# Altium PCB AirReader.PcbDoc
Units mil, origin at the board's own origin, x right, y up, seen from the top; angles counter-clockwise.
Board outline 1377.95 x 3149.61 mil, 2 copper layers (Top Layer, Bottom Layer), stack 61.811 mil thick; 56 components, 46 nets, 271 pads, 33 vias.
Unrouted connection lines stored in the file: 52.
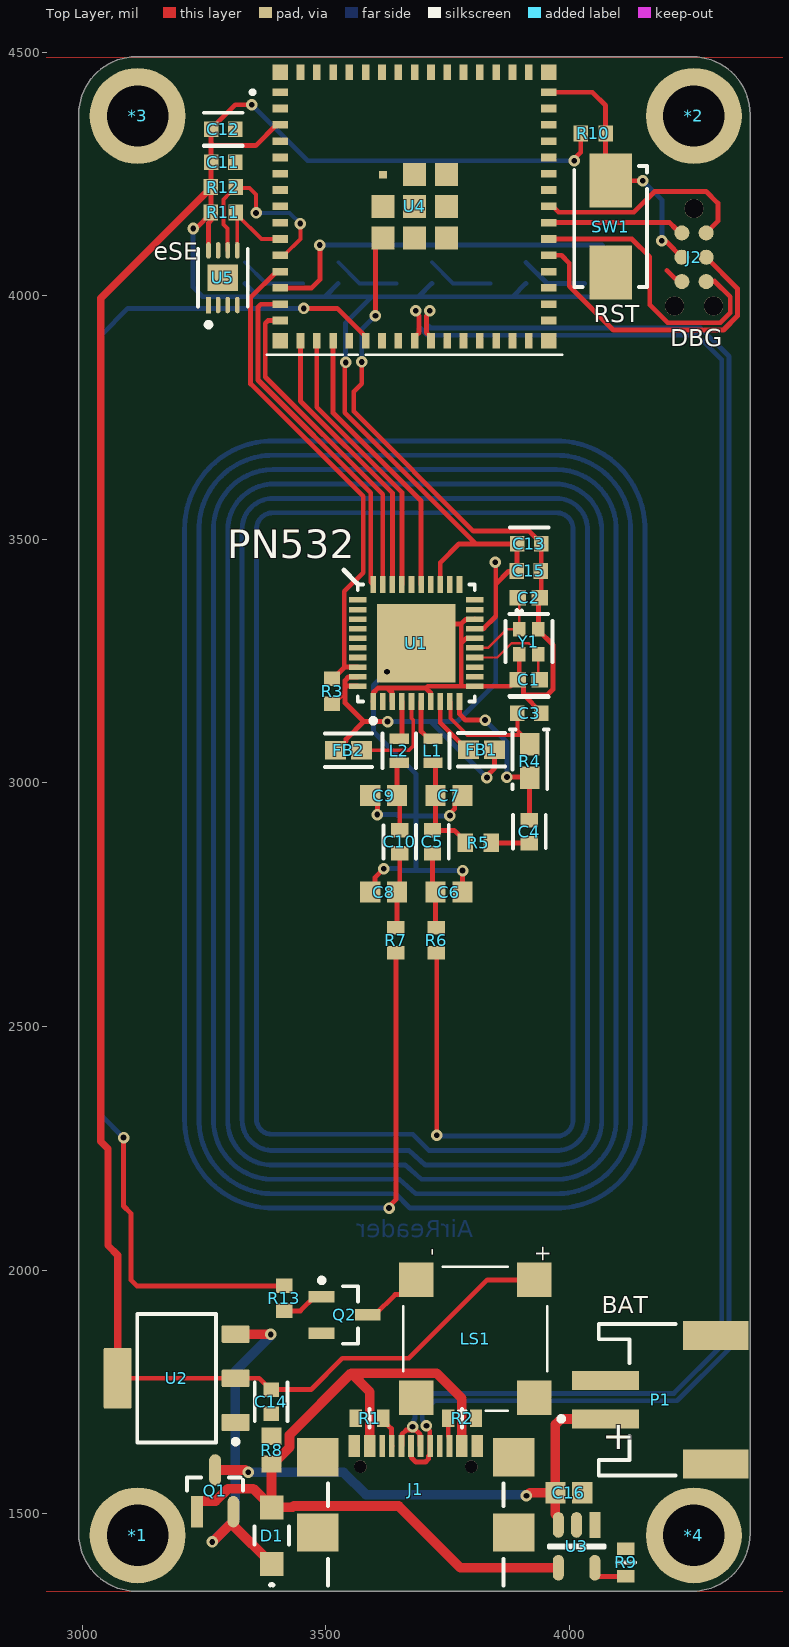
[diagram p0: Top Layer view]
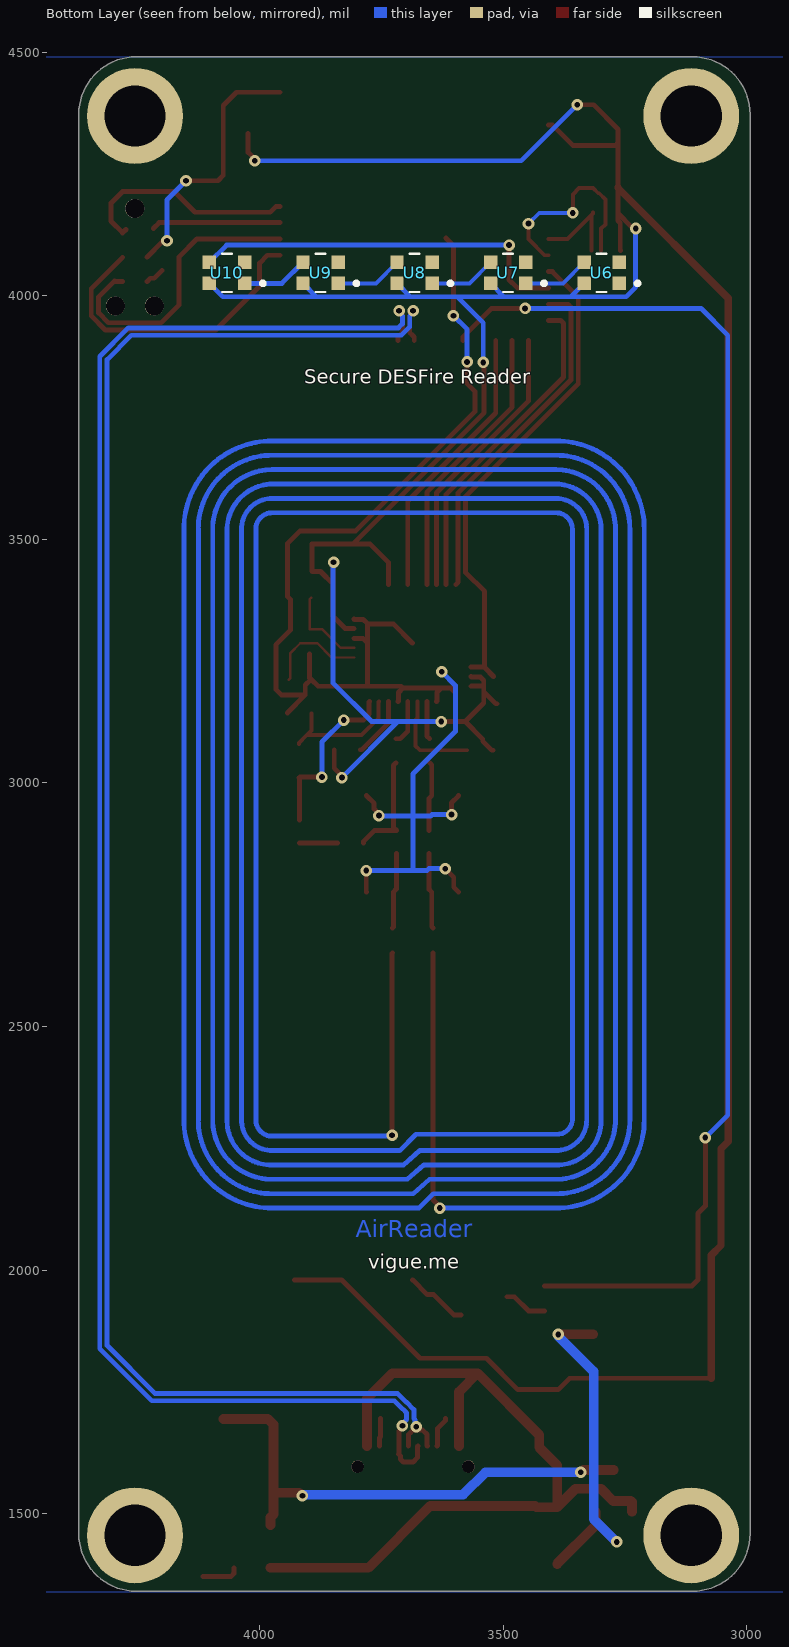
[diagram p1: Bottom Layer view, seen from below]

## Layer stack, top to bottom
Top Solder: solder mask 0.5, Solder Resist, Dk 3.8
Top Layer: signal copper 1.378
Dielectric: core 59.0551, FR-4, Dk 4.5
Bottom Layer: signal copper 1.378
Bottom Solder: solder mask 0.5, Solder Resist, Dk 3.8

## Board outline
2993.16,1459 2993.16,4372.39 cw(c3111.27,4372.39) 3111.27,4490.5 4253,4490.5 cw(c4253,4372.39) 4371.11,4372.39 4371.11,1459 cw(c4253,1459) 4253,1340.89 3111.27,1340.89 cw(c3111.27,1459)

## Design rules (kind name [scope] priority, off if disabled: settings)
AssemblyTestPointUsage [All] p0: scope1count=1 scope1_0_kind=Board scope1_0_value=Board scope2count=1 scope2_0_kind=Board scope2_0_value=Board commentlength=0
AssemblyTestpoint [All] p0: scope1count=1 scope1_0_kind=Board scope1_0_value=Board scope2count=1 scope2_0_kind=Board scope2_0_value=Board commentlength=0
BoardOutlineClearance [All] p0: scope1count=1 scope1_0_kind=Board scope1_0_value=Board scope2count=1 scope2_0_kind=Board scope2_0_value=Board commentlength=0 gap=7.87
BoardOutlineClearance [All] p1: gap=7.87 ignorepadtopadclearanceinfootprint=FALSE
Clearance [All] p0: scope1count=1 scope1_0_kind=Board scope1_0_value=Board scope2count=1 scope2_0_kind=Board scope2_0_value=Board commentlength=0 gap=5
Clearance [All] p1: gap=5 ignorepadtopadclearanceinfootprint=FALSE except(9.84: Arc-Hole Track-Hole SMDPad-Hole THPad-Hole Via-Hole Fill-Hole Poly-Hole Region-Hole Text-Hole)
ComponentClearance [All] p0: scope1count=1 scope1_0_kind=Board scope1_0_value=Board scope2count=1 scope2_0_kind=Board scope2_0_value=Board commentlength=0 gap=5 collisioncheckmode=3
ComponentClearance [All] p1: gap=5 collisioncheckmode=3 verticalgap=5 showdistances=TRUE
DiffPairsRouting [All] p0: scope1count=1 scope1_0_kind=Board scope1_0_value=Board scope2count=1 scope2_0_kind=Board scope2_0_value=Board commentlength=0
DiffPairsRouting [All] p1: maxlimit=10 minlimit=5 mostfreqgap=5 toplayer_minwidth=5 toplayer_maxwidth=1000 toplayer_prefwidth=5 bottomlayer_minwidth=5 bottomlayer_maxwidth=1000 bottomlayer_prefwidth=5 maxuncoupledlength=500
FabricationTestPointUsage [All] p0: scope1count=1 scope1_0_kind=Board scope1_0_value=Board scope2count=1 scope2_0_kind=Board scope2_0_value=Board commentlength=0 valid=0 allowmultiple=FALSE
FabricationTestpoint [All] p0: scope1count=1 scope1_0_kind=Board scope1_0_value=Board scope2count=1 scope2_0_kind=Board scope2_0_value=Board commentlength=0 side=3 testpointundercomponent=TRUE minsize=40 maxsize=100 preferedsize=60 minholesize=0 maxholesize=40 preferedholesize=32 testpointgrid=1
FanoutControl Fanout_Default [All] p0: scope1count=1 scope1_0_kind=Board scope1_0_value=Board scope2count=1 scope2_0_kind=Board scope2_0_value=Board commentlength=30 // Fanout_Default (Default Rule)
FanoutControl Fanout_Small [All] p0 off: scope1count=1 scope1_0_kind=Board scope1_0_value=Board scope2count=1 scope2_0_kind=Board scope2_0_value=Board commentlength=84 // Protel DXP Scope 1 Expression Was: (CompPinCount < 5)   Fanout_Small (Default Rule)
FanoutControl Fanout_SOIC [All] p0 off: scope1count=1 scope1_0_kind=Board scope1_0_value=Board scope2count=1 scope2_0_kind=Board scope2_0_value=Board commentlength=71 // Protel DXP Scope 1 Expression Was: IsSOIC   Fanout_SOIC (Default Rule)
FanoutControl Fanout_LCC [All] p0 off: scope1count=1 scope1_0_kind=Board scope1_0_value=Board scope2count=1 scope2_0_kind=Board scope2_0_value=Board commentlength=69 // Protel DXP Scope 1 Expression Was: IsLCC   Fanout_LCC (Default Rule)
FanoutControl Fanout_BGA [All] p0 off: scope1count=1 scope1_0_kind=Board scope1_0_value=Board scope2count=1 scope2_0_kind=Board scope2_0_value=Board commentlength=69 // Protel DXP Scope 1 Expression Was: IsBGA   Fanout_BGA (Default Rule)
Height [All] p0: scope1count=1 scope1_0_kind=Board scope1_0_value=Board scope2count=1 scope2_0_kind=Board scope2_0_value=Board commentlength=0
Height [All] p1: minheight=0 maxheight=71497.94 prefheight=500
HoleSize [All] p0: scope1count=1 scope1_0_kind=Board scope1_0_value=Board scope2count=1 scope2_0_kind=Board scope2_0_value=Board commentlength=0 absolutevalues=TRUE maxlimit=248.03 minlimit=11.81 maxpercent=80.000 minpercent=20.000
HoleSize [All] p1: absolutevalues=TRUE maxlimit=248.03 minlimit=11.81 maxpercent=80.000 minpercent=20.000
HoleToHoleClearance [All] p0: scope1count=1 scope1_0_kind=Board scope1_0_value=Board scope2count=1 scope2_0_kind=Board scope2_0_value=Board commentlength=0
HoleToHoleClearance [All] p1: gap=9.84 allowstackedmicrovias=FALSE
LayerPairs [All] p0: scope1count=1 scope1_0_kind=Board scope1_0_value=Board scope2count=1 scope2_0_kind=Board scope2_0_value=Board commentlength=0 enforce=TRUE
MinimumAnnularRing [All] p0: scope1count=1 scope1_0_kind=Board scope1_0_value=Board scope2count=1 scope2_0_kind=Board scope2_0_value=Board commentlength=0 minimumring=3
MinimumAnnularRing [All] p1: minimumring=3
MinimumSolderMaskSliver [All] p0: scope1count=1 scope1_0_kind=Board scope1_0_value=Board scope2count=1 scope2_0_kind=Board scope2_0_value=Board commentlength=0
MinimumSolderMaskSliver [All] p1: minsoldermaskwidth=0
NetAntennae [All] p0: scope1count=1 scope1_0_kind=Board scope1_0_value=Board scope2count=1 scope2_0_kind=Board scope2_0_value=Board commentlength=0
PasteMaskExpansion [All] p0: scope1count=1 scope1_0_kind=Board scope1_0_value=Board scope2count=1 scope2_0_kind=Board scope2_0_value=Board commentlength=0 expansion=0
PlaneClearance [All] p0: scope1count=1 scope1_0_kind=Board scope1_0_value=Board scope2count=1 scope2_0_kind=Board scope2_0_value=Board commentlength=0 clearance=5
PlaneClearance [All] p1: clearance=5
PlaneConnect [All] p0: scope1count=1 scope1_0_kind=Board scope1_0_value=Board scope2count=1 scope2_0_kind=Board scope2_0_value=Board commentlength=0 planeconnectstyle=Relief reliefexpansion=11.81 reliefentries=4 reliefconductorwidth=5 reliefairgap=5
PlaneConnect PlaneConnectPowerPads [All] p0: scope1count=1 scope1_0_kind=PadClass scope1_0_value=PowerPads scope2count=1 scope2_0_kind=Board scope2_0_value=Board commentlength=0 planeconnectstyle=Direct reliefexpansion=20 reliefentries=4 reliefconductorwidth=10 reliefairgap=10
PlaneConnect PlaneConnectPowerPads [InPadClass('PowerPads')] p1: planeconnectstyle=Direct reliefexpansion=20 reliefentries=4 reliefconductorwidth=10 reliefairgap=10
PlaneConnect [All] p2: pad.planeconnectstyle=Relief pad.reliefexpansion=11.81 pad.reliefentries=4 pad.reliefconductorwidth=5 pad.reliefairgap=5 via.planeconnectstyle=Direct via.reliefexpansion=11.81 via.reliefentries=4 via.reliefconductorwidth=5 via.reliefairgap=5
PolygonConnect [All] p0: scope1count=1 scope1_0_kind=Board scope1_0_value=Board scope2count=1 scope2_0_kind=Board scope2_0_value=Board commentlength=0 connectstyle=Relief reliefconductorwidth=5 reliefentries=4 polygonreliefangle="90 Angle"
PolygonConnect PolygonConnectPowerPads [All] p0 off: scope1count=1 scope1_0_kind=Board scope1_0_value=Board scope2count=1 scope2_0_kind=Board scope2_0_value=Board commentlength=64 connectstyle=Direct reliefconductorwidth=10 reliefentries=4 polygonreliefangle="90 Angle" // Protel DXP Scope 2 Expression Was: (InPadClass('PowerPads'))
PolygonConnect PolygonConnectPowerPads [All vs (InPadClass('PowerPads'))] p1: connectstyle=Direct reliefconductorwidth=10 reliefentries=4 polygonreliefangle="90 Angle" airgapwidth=10
PolygonConnect [All] p2: thpad.connectstyle=Relief thpad.reliefconductorwidth=5 thpad.reliefentries=4 thpad.polygonreliefangle="90 Angle" thpad.airgapwidth=5 smdpad.connectstyle=Relief smdpad.reliefconductorwidth=5 smdpad.reliefentries=4 smdpad.polygonreliefangle="90 Angle" smdpad.airgapwidth=5 via.connectstyle=Direct via.reliefconductorwidth=5 via.reliefentries=4 via.polygonreliefangle="90 Angle" via.airgapwidth=5
RoutingCorners [All] p0: scope1count=1 scope1_0_kind=Board scope1_0_value=Board scope2count=1 scope2_0_kind=Board scope2_0_value=Board commentlength=0 cornerstyle=45-Degree minsetback=100 maxsetback=100
RoutingLayers [All] p0: scope1count=1 scope1_0_kind=Board scope1_0_value=Board scope2count=1 scope2_0_kind=Board scope2_0_value=Board commentlength=0 top layer=Automatic bottom layer=Automatic
RoutingPriority [All] p0: scope1count=1 scope1_0_kind=Board scope1_0_value=Board scope2count=1 scope2_0_kind=Board scope2_0_value=Board commentlength=0
RoutingTopology [All] p0: scope1count=1 scope1_0_kind=Board scope1_0_value=Board scope2count=1 scope2_0_kind=Board scope2_0_value=Board commentlength=0 topology=Shortest
RoutingVias [All] p0: scope1count=1 scope1_0_kind=Board scope1_0_value=Board scope2count=1 scope2_0_kind=Board scope2_0_value=Board commentlength=0 holewidth=11.81 width=23.62 viastyle="Through Hole" minholewidth=11.81 minwidth=23.62 maxholewidth=23.62 maxwidth=259.84
RoutingVias [All] p1: holewidth=11.81 width=23.62 viastyle="Through Hole" minholewidth=11.81 minwidth=23.62 maxholewidth=23.62 maxwidth=259.84
ShortCircuit [All] p0: scope1count=1 scope1_0_kind=Board scope1_0_value=Board scope2count=1 scope2_0_kind=Board scope2_0_value=Board commentlength=0 allowed=FALSE
SilkToBoardRegionClearance [All] p0: scope1count=1 scope1_0_kind=Board scope1_0_value=Board scope2count=1 scope2_0_kind=Board scope2_0_value=Board commentlength=0
SilkToSilkClearance [All] p0: scope1count=1 scope1_0_kind=Board scope1_0_value=Board scope2count=1 scope2_0_kind=Board scope2_0_value=Board commentlength=0
SilkToSilkClearance [All] p1: silktosilkclearance=0
SilkToSolderMaskClearance [All] p0 off: scope1count=1 scope1_0_kind=Board scope1_0_value=Board scope2count=1 scope2_0_kind=Board scope2_0_value=Board commentlength=44 // Protel DXP Scope 1 Expression Was: IsPad
SilkToSolderMaskClearance [IsPad] p1: minsilkscreentomaskgap=5 clearancetoexposedcopper=TRUE
SolderMaskExpansion [All] p0: scope1count=1 scope1_0_kind=Board scope1_0_value=Board scope2count=1 scope2_0_kind=Board scope2_0_value=Board commentlength=0 expansion=2.95
SolderMaskExpansion [All] p1: expansion=2.95 istentingtop=FALSE
UnRoutedNet [All] p0: scope1count=1 scope1_0_kind=Board scope1_0_value=Board scope2count=1 scope2_0_kind=Board scope2_0_value=Board commentlength=0
UnpouredPolygon [All] p0: scope1count=1 scope1_0_kind=Board scope1_0_value=Board scope2count=1 scope2_0_kind=Board scope2_0_value=Board commentlength=0
Width [All] p0: scope1count=1 scope1_0_kind=Board scope1_0_value=Board scope2count=1 scope2_0_kind=Board scope2_0_value=Board commentlength=0 maxlimit=1000 minlimit=5 preferedwidth=5
Width [All] p1: maxlimit=1000 minlimit=5 preferedwidth=5 minimp=50.000000 maximp=50.000000 favimp=50.000000
20 further rules are at their usual default settings.

## Classes and differential pairs
net class N000-1_[8..16]: IO8 IO9 IO10 IO11 IO12 IO13 IO14 IO15 IO16
component class Peripherals: LS1 Q2 r R13 U6 U7 U8 U9 U10
component class ESP32: *1 *2 *3 *4 J2 R10 R11 SW1 U4 U5
component class Power: C11 C12 C13 C14 C15 C16 D1 Q1 R8 R9 U2 U3
component class PN532: C1 C2 C3 C4 C5 C6 C7 C8 C9 C10 FB1 FB2 L1 L2 R3 R4 R5 R6 R7 U1 Y1
component class Connectors: J1 P1 R1 R2
differential pair " ": +USB_P -USB_N

## Components (designator, comment, footprint, x,y, rotation, side; value= is the part's Value field where it differs from the comment)
*1 "PTH-M3D5X5" PTH-M3D5X5-Footprint-1 3114,1455.61 r0 top
*2 "PTH-M3D5X5" PTH-M3D5X5-Footprint-1 4255.73,4369 r0 top
*3 "PTH-M3D5X5" PTH-M3D5X5-Footprint-1 3114,4369 r0 top
*4 "PTH-M3D5X5" PTH-M3D5X5-Footprint-1 4255.73,1455.61 r0 top
C1 "CC0603JRNPO9BN330" FP-CC0603-0_9-IPC_C 3917,3212 r0 top
C2 "CC0603JRNPO9BN330" FP-CC0603-0_9-IPC_C 3917,3380 r180 top
C3 "CL10A106MR8NNNC" FP-CL10-IPC_C 3918,3143 r180 top
C4 "C0603C102K5RACTU" FP-C0603C-CF-MFG 3918,2900 r90 top
C5 "C0603C220J1GACTU" FP-C0603C-CF-MFG 3719,2879 r90 top
C6 "VJ0603A101JXACW1BC" CAPC1608X95X40ML15T15 3753,2776 r180 top
C7 "VJ0603A221JXACW1BC" CAPC1608X95X40ML15T15 3753,2974 r180 top
C8 "VJ0603A101JXACW1BC" CAPC1608X95X40ML15T15 3619,2776 r180 top
C9 "VJ0603A221JXACW1BC" CAPC1608X95X40ML15T15 3619,2974 r180 top
C10 "C0603C220J1GACTU" FP-C0603C-CF-MFG 3652,2879 r270 top
C11 "CL10A106MR8NNNC" FP-CL10-IPC_C 3290,4274 r0 top
C12 "CL10A106MR8NNNC" FP-CL10-IPC_C 3290,4342 r0 top
C13 "CL10A106MR8NNNC" FP-CL10-IPC_C 3917.68,3491 r0 top
C14 "CL10A106MR8NNNC" FP-CL10-IPC_C 3388,1730 r270 top
C15 "CL10A106MR8NNNC" FP-CL10-IPC_C 3917,3435 r0 top
C16 "VJ0603A221JXACW1BC" CAPC1608X95X40ML15T15 3999,1543 r180 top
D1 "MBR120ESFT1G" On_Semiconductor_498_MFG 3389,1455 r90 top
FB1 "BLM18AG121SN1D" FP-BLM18-0_15-t0_8-IPC_B 3820,3068 r180 top
FB2 "BLM18AG121SN1D" FP-BLM18-0_15-t0_8-IPC_B 3547,3067 r0 top
J1 "USB4110-GF-A" FP-USB4110-GF-A-MFG 3685,1494 r0 top
J2 "TC2030-IDC-NL" TAG_TC2030-IDC-NL 4256,4079 r270 top
L1 "BRC1608TR56M" FP-BRC1608-MFG 3720,3066 r90 top
L2 "BRC1608TR56M" FP-BRC1608-MFG 3651,3066 r90 top
LS1 "CMT-7525-80-SMT-TR" XDCR_CMT-7525-80-SMT-TR 3807,1859 r270 top
P1 "S2B-PH-SM4-TB(LF)(SN)" "JST- S2B-PH-SM4-TB(LF)(SN)-2_V" 4210,1734 r90 top
Q1 "FDN336P" FP-527AG-IPC_A 3273,1547 r90 top
Q2 "2N7002" INF-PG-SOT23_M 3539,1908 r0 top
R1 "ERJ-3EKF5101V" FP-ERJ3EK-MFG 3590,1696 r180 top
R2 "ERJ-3EKF5101V" FP-ERJ3EK-MFG 3780,1696 r0 top
R3 "ERJ3EKF1002V" RESC1609X55X30LL15T15 3513,3188 r270 top
R4 "RK73H1JTTDD1001F" FP-RK73H1J-IPC_A 3919,3045 r270 top
R5 "ERJ-3EKF1691V" RESC1608X55X30NL15T15 3813,2877 r180 top
R6 "RK73B1JTTD152J" RESC1608X55X30LL20T10 3727,2677 r90 top
R7 "RK73B1JTTD152J" RESC1608X55X30LL20T10 3644,2677 r90 top
R8 "ERJ-3EKF1003V" RESC1608X55X30ML15T15 3389,1630.46 r270 top
R9 "ERJ-3EKF5101V" FP-ERJ3EK-MFG 4116,1400 r90 top
R10 "ERJ3EKF1002V" RESC1609X55X30LL15T15 4049,4333 r180 top
R11 "ERJ3EKF1002V" RESC1609X55X30LL15T15 3290,4171 r180 top
R12 "ERJ3EKF1002V" RESC1609X55X30LL15T15 3290,4223 r180 top
R13 "ERJ3EKF1002V" RESC1609X55X30LL15T15 3415,1942 r270 top
SW1 "147873-1" FP-147873-1-MFG 4085,4142 r90 top
U1 "PN5321A3HN/C106,51" FP-SOT618-1-MFG 3686,3287 r90 top
U2 "LM1117MPX-3.3/NOPB" DCY0004A_L 3194,1778 r180 top
U3 "MCP73831T-2DCI/OT" FP-C04-091-OT-IPC_B 4015,1433 r270 top
U4 "ESP32-S3-MINI-1-N8" XCVR_ESP32-S3-MINI-1-N8 3682.54,4183.41 r0 top
U5 "ATECC608B-MAHDA-S" FP-C04-21355-Q4B-IPC_B 3289,4037 r90 top
U6 "WS2812-2020" LED_WS2812-2020 3297.87,4047 r180 bottom
U7 "WS2812-2020" LED_WS2812-2020 3489.87,4047 r180 bottom
U8 "WS2812-2020" LED_WS2812-2020 3681.87,4047 r180 bottom
U9 "WS2812-2020" LED_WS2812-2020 3874.87,4047 r180 bottom
U10 "WS2812-2020" LED_WS2812-2020 4066.87,4047 r180 bottom
Y1 "ABM11-27.120MHZ-B1U-T" FP-ABM11-MFG 3917,3290 r270 top

## Footprints (in the part's own frame and the unit in brackets; to place one, negate y for a bottom-side part, rotate by r counter-clockwise, add the part's x,y. Pads: shape width x height; smd on the part's side, far side on the other; paste and mask are expansions set on the pad)
CAPC1608X95X40ML15T15 [mm] "Chip Capacitor, 2-Leads, Body 1.60x0.80mm, IPC Low Density"
  rect 1.05x1.1 smd: 1(-0.7,0) 2(0.7,0)
DCY0004A_L [mm] "SOT223, 4-Leads, Body 6.7x3.7mm, Pitch 2.3mm, IPC High Density"
  rrect11% 1.45x0.9 smd: 1(-3.075,2.3) 2(-3.075,0) 3(-3.075,-2.3)
  rrect7% 1.45x3.15 smd: 4(3.075,0)
  silkscreen extent -3.2,-3.35 2.05,3.42
FP-527AG-IPC_A [mm]
  rect 1.636x0.625 smd paste+0 mask+0: 1(-1.09,0.95)
  rrect100% 1.636x0.625 smd paste+0 mask+0: 2(-1.09,-0.95) 3(1.09,0)
  silkscreen extent 0,-1.46 0.7,1.46
FP-147873-1-MFG [mm]
  rect 2.8x2.2 smd paste+0 mask+0: 1(-2.4,0) 2(2.4,0)
  silkscreen extent -3.15,-1.9 3.15,1.9
FP-ABM11-MFG [mm]
  rect 0.75x0.65 smd paste+0 mask+0: 1(-0.65,-0.5) 2(0.65,-0.5) 3(0.65,0.5) 4(-0.65,0.5)
  silkscreen extent -1.63,-1.22 1.07,1.22
FP-BLM18-0_15-t0_8-IPC_B [mil]
  rect 43.55x37.73 smd paste+0 mask+0: 1(-26.62,0) 2(26.62,0)
  silkscreen extent -48,-35 48,35
FP-BRC1608-MFG [mm]
  rect 0.55x1 smd paste+0 mask+0: 1(-0.625,0) 2(0.625,0)
  silkscreen extent -0.9,-0.87 0.9,0.87
FP-C04-091-OT-IPC_B [mm]
  rect 1.338x0.578 smd paste+0 mask+0: 1(-1.116,0.95)
  rrect100% 1.338x0.578 smd paste+0 mask+0: 2(-1.116,0) 3(-1.116,-0.95) 4(1.116,-0.95) 5(1.116,0.95)
  silkscreen extent -0.05,-1.45 0.05,1.45
FP-C04-21355-Q4B-IPC_B [mm]
  rect 0.861x0.239 smd paste+0 mask+0: 1(-1.426,0.75)
  rrect100% 0.861x0.239 smd paste+0 mask+0: 2(-1.426,0.25) 3(-1.426,-0.25) 4(-1.426,-0.75) 5(1.426,-0.75) 6(1.426,-0.25) 7(1.426,0.25) 8(1.426,0.75)
  rect 1.4x1.6 smd paste-1000 mask+0: 9(0,0)
  silkscreen extent -2.57,-1.3 1.5,1.3
FP-C0603C-CF-MFG [mm]
  rect 0.75x0.9 smd paste+0 mask+0: 1(-0.6,0) 2(0.6,0)
  silkscreen extent -0.87,-0.85 0.88,0.85
FP-CC0603-0_9-IPC_C [mil]
  rect 33.79x31.97 smd paste+0 mask+0: 1(-22.72,0) 2(22.72,0)
  silkscreen extent -40,-33 40,-33
FP-CL10-IPC_C [mil]
  rect 29.85x31.97 smd paste+0 mask+0: 1(-24.68,0) 2(24.68,0)
  silkscreen extent -40,-33 40,33
FP-ERJ3EK-MFG [mm]
  rect 0.65x0.9 smd paste+0 mask+0: 1(-0.725,0) 2(0.725,0)
  silkscreen extent 0,-0.48 0,0.48
FP-RK73H1J-IPC_A [mil]
  rect 45.5x39.85 smd paste+0 mask+0: 1(-34.46,0) 2(34.46,0)
  silkscreen extent -57,-36 57,36
FP-SOT618-1-MFG [mm]
  rect 0.9x0.29 smd paste-1000 mask+0: 1(-3.05,2.25) 2(-3.05,1.75) 3(-3.05,1.25) 4(-3.05,0.75) 5(-3.05,0.25) 6(-3.05,-0.25) 7(-3.05,-0.75) 8(-3.05,-1.25) 9(-3.05,-1.75) 10(-3.05,-2.25) 21(3.05,-2.25) 22(3.05,-1.75) 23(3.05,-1.25) 24(3.05,-0.75) 25(3.05,-0.25) 26(3.05,0.25) 27(3.05,0.75) 28(3.05,1.25) 29(3.05,1.75) 30(3.05,2.25)
  rect 0.29x0.9 smd paste-1000 mask+0: 11(-2.25,-3.05) 12(-1.75,-3.05) 13(-1.25,-3.05) 14(-0.75,-3.05) 15(-0.25,-3.05) 16(0.25,-3.05) 17(0.75,-3.05) 18(1.25,-3.05) 19(1.75,-3.05) 20(2.25,-3.05) 31(2.25,3.05) 32(1.75,3.05) 33(1.25,3.05) 34(0.75,3.05) 35(0.25,3.05) 36(-0.25,3.05) 37(-0.75,3.05) 38(-1.25,3.05) 39(-1.75,3.05) 40(-2.25,3.05)
  rect 4.1x4.1 smd paste-1000 mask+0: 41(0,0)
  silkscreen extent -4.17,-3.05 3.05,3.05
FP-USB4110-GF-A-MFG [mm]
  rect 2.18x2 smd paste+0 mask+0: 1(-5.11,3.105) 2(5.11,3.105) 3(-5.11,-0.825) 4(5.11,-0.825)
  rect 0.6x1.15 smd paste+0 mask+0: A1-B12(-3.2,3.68) A4-B9(-2.4,3.68) B1-A12(3.2,3.68) B4-A9(2.4,3.68)
  rect 0.3x1.15 smd paste+0 mask+0: A5(-1.25,3.68) A6(-0.25,3.68) A7(0.25,3.68) A8(1.25,3.68) B5(1.75,3.68) B6(0.75,3.68) B7(-0.75,3.68) B8(-1.75,3.68)
  round 0.65 hole 0.65 unplated paste+0 mask+0: ""(-2.89,2.605) ""(2.89,2.605)
  silkscreen extent -4.57,-3.59 4.57,1.73
INF-PG-SOT23_M [mm] "SOT23, 3-Leads, Body 2.9x1.3mm, Pitch 0.95mm, IPC Low Density"
  rect 1.35x0.6 smd: 1(-1.2,0.95) 2(-1.2,-0.95) 3(1.2,0)
  silkscreen extent -1.32,-1.5 0.7,1.92
"JST- S2B-PH-SM4-TB(LF)(SN)-2_V" [mm] "SMD, 2-Leads, Body 7.9x7.6mm, Pitch 2mm"
  rect 1x3.5 smd: 1(-1,3.45) 2(1,3.45)
  rect 1.5x3.4 smd: MP1(-3.35,-2.3) MP2(3.35,-2.3)
  silkscreen extent -3.95,-0.2 3.95,5.87
LED_WS2812-2020 [mm]
  rect 0.7x0.7 smd: 1(0.915,-0.55) 2(0.915,0.55) 3(-0.915,0.55) 4(-0.915,-0.55)
  silkscreen extent -0.25,-1 1.97,1
On_Semiconductor_498_MFG [mm]
  rect 1.25x1.22 smd paste+0 mask+0: 1(-1.475,0) 2(1.475,0)
  silkscreen extent -2.57,-0.9 0.48,0.9
PTH-M3D5X5-Footprint-1 [mm]
  round 5 hole 3.2: 1(0,0)
RESC1608X55X30LL20T10 [mm] "Chip Resistor, 2-Leads, Body 1.60x0.80mm, IPC High Density"
  rect 0.7x0.9 smd: 1(-0.65,0) 2(0.65,0)
RESC1608X55X30ML15T15 [mm] "Chip Resistor, 2-Leads, Body 1.60x0.80mm, IPC Low Density"
  rect 0.9x1.05 smd: 1(-0.725,0) 2(0.725,0)
RESC1608X55X30NL15T15 [mm] "Chip Resistor, 2-Leads, Body 1.60x0.80mm, IPC Medium Density"
  rect 0.8x0.95 smd: 1(-0.675,0) 2(0.675,0)
RESC1609X55X30LL15T15 [mm] "Chip Resistor, 2-Leads, Body 1.75x0.95mm, IPC High Density"
  rect 0.75x0.85 smd: 1(-0.65,0) 2(0.65,0)
TAG_TC2030-IDC-NL [mil]
  round 30.98 smd paste-39.37: 1(-50,-25) 2(-50,25) 3(0,-25) 4(0,25) 5(50,-25) 6(50,25)
  round 39.02 hole 39.02 unplated: ""(-100,0) ""(100,40) ""(100,-40)
XCVR_ESP32-S3-MINI-1-N8 [mm]
  rect 0.8x0.4 smd: 1(-7,5.95) 2(-7,5.1) 3(-7,4.25) 4(-7,3.4) 5(-7,2.55) 6(-7,1.7) 7(-7,0.85) 8(-7,0) 9(-7,-0.85) 10(-7,-1.7) 11(-7,-2.55) 12(-7,-3.4) 13(-7,-4.25) 14(-7,-5.1) 15(-7,-5.95) 31(7,-5.95) 32(7,-5.1) 33(7,-4.25) 34(7,-3.4) 35(7,-2.55) 36(7,-1.7) 37(7,-0.85) 38(7,0) 39(7,0.85) 40(7,1.7) 41(7,2.55) 42(7,3.4) 43(7,4.25) 44(7,5.1) 45(7,5.95)
  rect 0.4x0.8 smd: 16(-5.95,-7) 17(-5.1,-7) 18(-4.25,-7) 19(-3.4,-7) 20(-2.55,-7) 21(-1.7,-7) 22(-0.85,-7) 23(0,-7) 24(0.85,-7) 25(1.7,-7) 26(2.55,-7) 27(3.4,-7) 28(4.25,-7) 29(5.1,-7) 30(5.95,-7) 46(5.95,7) 47(5.1,7) 48(4.25,7) 49(3.4,7) 50(2.55,7) 51(1.7,7) 52(0.85,7) 53(0,7) 54(-0.85,7) 55(-1.7,7) 56(-2.55,7) 57(-3.4,7) 58(-4.25,7) 59(-5.1,7) 60(-5.95,7)
  rect 1.2x1.2 smd: 61(0,0) 61_2(0,1.65) 61_3(1.65,1.65) 61_4(1.65,0) 61_5(1.65,-1.65) 61_6(0,-1.65) 61_7(-1.65,-1.65) 61_8(-1.65,0)
  rect 0.4x0.4 smd paste-1 mask+0: 61_1(-1.65,1.65)
  rect 0.8x0.8 smd: 62(-7,7) 63(-7,-7) 64(7,-7) 65(7,7)
  silkscreen extent -8.55,-7.73 7.7,6.05
XDCR_CMT-7525-80-SMT-TR [mm]
  rect 1.8x1.8 smd: 1(3.075,3.075) 2(3.075,-3.075) N(-3.075,-3.075) P(-3.075,3.075)
  silkscreen extent -3.75,-3.75 3.75,3.75

## Part data
*1 *2 *3 *4: library part CMP-010-00024-1, "Plated Thru-Hole M3 D5X5"
C1 C2: library part CMP-2000-06072-2, "CAP CER 33PF 50V C0G/NPO 0603"
C3 C11 C12 C13 C14 C15: library part CMP-13271-001990-1, "Cap Ceramic 10uF 4V X5R ±20% Pad SMD 0603 +85°C T/R"
C4: library part CMP-2006-03022-3, "CAP CER 1000PF 50V X7R 0603"
C5 C10: library part CMP-2006-03322-2, "CAP CER 22PF 100V 5% NP0 0603"
C6 C8: library part CMP-2006-01530-1
C7 C9 C16: library part CMP-2006-00030-1
D1: library part CMP-1055-00434-2
FB1 FB2: library part CMP-0686-00439-3, "Chip Ferrite Bead, 0603, 120O @ 100MHz, 0.18O, 25%, 800mA"
J1: library part CMP-245163-000002-1, "CONN USB 2.0 TYPE-C R/A SMT"
J2: library part CMP-070-000001-2, "CABLE ADAPTER 6 POS"
L1 L2: library part CMP-14484-000012-1, "FIXED IND 560NH 760MA 95 MOHM"
P1: library part CMP-1755-00001-1, "Male Header, Pitch 2 mm, 1 x 2 Position, Height 5.5 mm, -25 to 85 degC, RoHS, Tape and Reel"
Q1: library part CMP-07173-000103-1, "MOSFET P-CH 20V 1.3A SSOT3"
Q2: library part CMP-1149-00026-1, "N-Channel OptiMOS Small-Signal-Transistor, 60 V VDS, 0.3 A ID, -55 to 150 degC, PG-SOT23, Reel, Green"
R1 R2 R9: library part CMP-2000-00540-8, "RES SMD 5.1K OHM 1% 1/10W 0603"
R3 R10 R11 R12 R13: library part CMP-1012-00623-3, "Chip Resistor, 10 KOhm, +/- 1%, 0.1 W, -55 to 155 degC, 0603 (1608 Metric), RoHS, Tape and Reel"
R4: library part CMP-2000-01750-2, "1kO ±1% 0.125W Chip Resistor 0603 Thick Film AEC-Q200 Qualified"
R5: library part CMP-1012-00534-2
R6 R7: library part CMP-2000-01875-1
R8: library part CMP-2000-00182-1
SW1: library part CMP-03407-000005-1, "SWITCH TACTILE SPST-NO 0.05A 24V"
U1: library part CMP-10150-000009-1, "IC RFID RDR/TRAN 13.56MZ 40HVQFN"
U2: library part CMP-0062-01639-4, "800mA Low-Dropout Linear Regulator, 4-pin SOT-223, Pb-Free"
U3: library part CMP-0133-00146-2, "IC CONTROLLR LI-ION 4.2V SOT23-5"
U4: "Bluetooth, WiFi 802.11b/g/n, Bluetooth v5.0 Transceiver Module 2.4GHz PCB Trace Surface Mount"
U5: library part CMP-06260-000008-1, "IC AUTHENTICATION CHIP"
Y1: library part CMP-27762-005978-1, "Crystal 27.12MHz ±10ppm 10pF SMD-4 2mm x 1.6mm"

## Via types
v1: diameter 23.62, hole 11.81, Top Layer to Bottom Layer, 33 vias

## Nets (pads, with @x,y where several pads share a name; then routed paths per layer and width w, separated by ;. In a path a pad name is that pad's centre, name@x,y a point inside that pad or via, vN(x,y) a via of type N, cw(c..) or ccw(c..) an arc to the next point about the centre after c; other vN are vias at no path point)
+5: D1.2 J1.A4-B9 J1.B4-A9 Q1.1 R8.2 U3.4 | length 1696.9
  Top Layer w20: Q1.1 3235.6,1523.98 3237.9,1526.29 3274.09,1526.29 3299.09,1551.29 3351.37,1551.29 D1.2@3389,1513.66 ; J1.A4-B9 3590.51,1750.31 3552.45,1788.37 ; J1.B4-A9 3779.49,1736.47 3727.58,1788.37 3552.45,1788.37 ; U3.4 3776.67,1389.05 3649.84,1515.89 3434.69,1515.89 3431.87,1513.07 D1.2 D1.2@3389,1513.66 ; D1.2@3389,1513.66 3389,1599.4 3425.91,1636.31 3425.91,1661.83 3552.45,1788.37
AVDD: FB1.2 U1.8 | length 124.7
  Top Layer w10: U1.8 3735.21,3123.26 3790.47,3068 FB1.2
BAT+: C16.2 P1.1 Q1.3 U3.3 | length 1038.9
  Top Layer w20: Q1.3 3335.1,1589.92 3340.02,1585 v1(3341,1585) ; v1(3912,1537) 3912.98,1537 3918.98,1543 C16.2 ; U3.3 3977.6,1492.66 3971.44,1498.82 C16.2 ; P1.1 3983.16,1694.63 3971.44,1682.91 C16.2
  Bottom Layer w20: v1(3341,1585) 3536.62,1585 3582.62,1539 3907,1539 3909,1537 v1(3912,1537)
CC1: J1.A5 R1.1 | length 64.3
  Top Layer w10: R1.1 3618.54,1691.08 3634.88,1674.74 3634.88,1639.79 J1.A5
CC2: J1.B5 R2.1 | length 58.1
  Top Layer w10: R2.1 3751.46,1658.06 3753.9,1655.61 J1.B5
EN: J2.3 R10.1 SW1.2 U4.45 | length 546.4
  Top Layer w10: U4.45 4047.34,4417.66 4074.59,4390.41 R10.1 4074.59,4246.9 SW1.2 4085.49,4236 v1(4151,4236) ; v1(4190,4113) 4192.61,4110.39 4199.61,4110.39 J2.3
  Bottom Layer w10: v1(4151,4236) 4190,4197 v1(4190,4113)
GND: *1.1 *2.1 *3.1 *4.1 C1.1 C2.1 C3.1 C6.1 C7.1 C8.2 C9.2 C11.2 C12.2 C13.2 C14.2 C15.2 C16.1 J1.1 J1.2 J1.3 J1.4 J1.A1-B12 J1.B1-A12 J2.5 P1.2 P1.MP1 P1.MP2 Q2.2 R1.2 R2.2 R8.1 R9.2 SW1.1 U1.1 U1.3 U1.7 U1.11 U1.16 U1.18 U1.41 U2.1 U3.2 U4.1 U4.2 U4.42 U4.43 U4.46 U4.47 U4.48 U4.49 U4.50 U4.51 U4.52 U4.53 U4.54 U4.55 U4.56 U4.57 U4.58 U4.59 U4.60 U4.61 U4.61_1 U4.61_2 U4.61_3 U4.61_4 U4.61_5 U4.61_6 U4.61_7 U4.61_8 U4.62 U4.63 U4.64 U4.65 U5.4 U5.9 U6.2 U7.2 U8.2 U9.2 U10.2 Y1.2 Y1.4 | length 3102.6
  Top Layer w10: v1(3574,3864) 3574,3819.66 3557.61,3803.26 3557.61,3762.61 3803.23,3516.99 3917.45,3516.99 3942.37,3492.06 C13.2 3942.37,3382.65 C2.1 3936.68,3376.97 Y1.4 3936.68,3313.62 3966.61,3283.7 3966.61,3191.87 3955.31,3180.57 3906.18,3180.57 ; C8.2 3601.52,2786.08 3601.52,2806.52 v1(3619,2824) ; C9.2 3606,2959.44 v1(3606,2935) ; U1.1 3598.13,3167.63 3598.13,3185.51 3607.25,3194.64 3626.95,3194.64 ; v1(3602,3959) 3602,4102.87 U4.61_7 ; U1.3 3636.08,3167.63 3636.08,3185.51 3626.95,3194.64 ; U1.41 3725.38,3326.38 3778.36,3326.38 ; U1.7 3714.82,3167.63 3714.82,3185.51 3705.69,3194.64 ; v1(3755,2933) 3755,2936.69 3764.89,2946.58 3764.89,2958.33 C7.1 ; C6.1 3781,2776.44 v1(3781,2820) ; U1.16 3805.37,3296.13 3787.49,3296.13 3778.36,3287.01 ; U1.18 3805.37,3335.5 3787.49,3335.5 3778.36,3326.38 ; Y1.2 3897.32,3215.03 C1.1 ; C3.1 3942.68,3144.06 3906.18,3180.57 ; 4200,4052 4216.15,4035.85 4224.15,4035.85 J2.5 ; 3626.95,3194.64 3705.69,3194.64 ; 3705.69,3194.64 3709.47,3198.42 3780,3198.42 ; 3778.36,3287.01 3778.36,3326.38 ; 3778.36,3287.01 3778.36,3200.06 3780,3198.42 ; 3780,3198.42 U1.11 3879.8,3198.42 3893.38,3212 C1.1 ; C1.1 3895.19,3212 3906.18,3201.01 3906.18,3180.57
  Bottom Layer w10: v1(3574,3864) 3574,3931 v1(3602,3959) ; v1(3606,2935) 3645.84,2935 3648.84,2932 3685,2932 ; v1(3619,2824) 3652.59,2824 3656.59,2820 3686.5,2820 ; v1(3626,3228) 3598,3200 3598,3105.5 3685,3018.5 3685,2932 ; v1(3755,2933) 3754,2932 3685,2932 ; v1(3781,2820) 3686.5,2820 ; 3685,2932 3685,2821.5 3686.5,2820
IO8: R3.1 U1.38 U4.12 | length 1008
  Top Layer w10: U4.12 3399.07,4049.55 3346,3996.48 3346,3819 3577,3588 3577,3431.81 3538.2,3393.02 3538.2,3237.79 ; R3.1@3519.85,3218.47 3538.2,3236.83 3538.2,3237.79 ; U1.38 3538.2,3237.79
IO9: U4.13 U10.3 | length 788.6
  Top Layer w10: U4.13 3471.09,4016.09 3488,4033 v1(3488,4104)
  Bottom Layer w10: v1(3488,4104) 4067.54,4104 U10.3
IO10: U1.30 U4.14 | length 716
  Top Layer w10: U4.14 3366.86,3982.62 3361,3976.76 3361,3827 3592.42,3595.58 3592.42,3412.08 U1.30
IO11: U1.29 U4.15 | length 669.5
  Top Layer w10: U4.15 3381.86,3949.16 3376,3943.3 3376,3833.21 3617.1,3592.11 U1.29
IO12: U1.28 U4.16 | length 578.8
  Top Layer w10: U4.16 3448.28,3783.72 3636.79,3595.21 U1.28
IO13: U1.27 U4.17 | length 573.1
  Top Layer w10: U4.17 3481.75,3771.47 3656.47,3596.74 U1.27
IO14: U1.25 U4.18 | length 575.6
  Top Layer w10: U4.18 3515.21,3759.21 3695.84,3578.58 U1.25
IO15: U4.19
IO16: R13.1 U4.20 | length 2882.4
  Top Layer w10: v1(3085,2272) 3085,2131.66 3100,2116.66 3100,1980 3112.41,1967.59 R13.1 ; v1(3455,3974) 3523.83,3974 3582.14,3915.69 U4.20
  Bottom Layer w10: v1(3085,2272) 3039,2318 3039,3919 3094,3974 v1(3455,3974)
NetC4_1: C4.1 R5.1 | length 78.7
  Top Layer w10: R5.1 3840.2,2876.38 C4.1
NetC5_1: C5.1 C6.2 R6.2 | length 156.1
  Top Layer w10: C5.1 3719,2782.44 C6.2 3725.44,2704.15 R6.2
NetC5_2: C5.2 C7.2 L1.1 R5.2 | length 223.5
  Top Layer w10: L1.1 3725.44,3035.95 C7.2 3725.44,2909.06 C5.2 3763.76,2902.62 3786.43,2879.95 R5.2
NetC8_1: C8.1 C10.2 R7.2 | length 156.1
  Top Layer w10: R7.2 3646.56,2705.15 C8.1 3652,2781.44 C10.2
NetC9_1: C9.1 C10.1 L2.1 | length 142.9
  Top Layer w10: L2.1 3646.56,3036.95 C9.1 3652,2968.56 C10.1
NetD1_1: D1.1 Q1.2 U2.3 | length 738.8
  Top Layer w20: v1(3267,1442) 3267.61,1442 3310.4,1484.79 Q1.2 ; Q1.2@3311.28,1475.24 3389,1397.52 D1.1 ; U2.3 3315.34,1868.28 3386.72,1868.28 v1(3387,1868)
  Bottom Layer w20: v1(3267,1442) 3314.19,1489.19 3314.19,1792.19 3387,1865 v1(3387,1868)
NetJ2_1: J2.1 U4.37 | length 264.8
  Top Layer w10: U4.37 4206.06,4149.94 4218,4138
NetJ2_2: J2.2 U4.38 | length 460.1
  Top Layer w10: U4.38 3966,4183.41 3978.04,4171.37 4132.45,4171.37 4175.08,4214 4281,4214 4305,4190 4305,4153 J2.2 J2.2@4274.15,4135.85
NetJ2_4: J2.4 U4.35 | length 637.4
  Top Layer w10: U4.35 3983.98,4083.02 4000,4067 4000,4019.94 4090.29,3929.65 4316.44,3929.65 4345.35,3958.56 4345.35,4014.65 J2.4
NetJ2_6: J2.6 U4.36 | length 605.6
  Top Layer w10: U4.36 4128.6,4116.48 4165.19,4079.89 4165.19,3981.24 4201.77,3944.65 4310.23,3944.65 4330.35,3964.77 4330.35,3997.65 4298,4030 4297,4029 J2.6
NetLS1_N: LS1.N Q2.3 | length 129.5
  Top Layer w10: Q2.3 3601.01,1908 3642.64,1949.63 3655.5,1949.63 LS1.N
NetQ2_1: Q2.1 R13.2 | length 88.8
  Top Layer w10: R13.2 3448,1916.41 3476.99,1945.4 Q2.1
NetR9_1: R9.1 U3.5 | length 77.6
  Top Layer w10: U3.5 4052.4,1377.54 4058.48,1371.46 R9.1
NetR11_1: R11.1 U4.10 U5.5 | length 188.1
  Top Layer w8: R11.1 3315.59,4169.03 R11.1@3318.53,4166.09 ; U5.5 R11.1@3318.53,4166.09 ; U4.10 3368.14,4116.48 R11.1@3318.53,4166.09
NetR12_1: R12.1 U4.11 U5.6 | length 414.8
  Top Layer w8: U5.6 3298.84,4137.59 3290,4146.43 3290,4197.41 3302.86,4210.27 3304.83,4210.27 3315.59,4221.03 3343.97,4221.03 3357,4208 v1(3357,4170) ; U4.11 3414.82,4083.02 3448,4116.2 v1(3448,4148)
  Bottom Layer w8: v1(3357,4170) 3426,4170 v1(3448,4148)
NetU6_3: U6.3 U7.1 | length 137.9
  Bottom Layer w8: U6.3 3377.2,4025.35 U7.1
NetU7_3: U7.3 U8.1 | length 137.9
  Bottom Layer w8: U7.3 3569.2,4025.35 U8.1
NetU8_3: U8.3 U9.1 | length 138.9
  Bottom Layer w8: U8.3 3761.2,4025.35 U9.1
NetU9_3: U9.3 U10.1 | length 137.9
  Bottom Layer w10: U9.3 3954.2,4025.35 U10.1
NFC_ANT: R6.1 R7.1 | length 26517.1
  Top Layer w10: v1(3630.19,2127.3) 3630.19,2130.99 3644,2144.8 R7.1 ; R6.1 3728,2650.41 v1(3728,2277)
  Bottom Layer w10: 3269.4,2308.4 3269.4,3521 ; 3269.5,2308.4 3269.7,2301.6 3270.3,2294.7 3271.2,2288 3272.6,2281.3 3274.3,2274.6 3276.3,2268.1 3278.8,2261.7 3281.6,2255.5 3284.7,2249.4 3288.2,2243.5 3292,2237.8 3296.1,2232.3 3300.5,2227.1 3305.2,2222.1 3310.2,2217.4 3315.4,2213 3320.9,2208.9 3326.6,2205.1 3332.5,2201.6 3338.6,2198.5 3344.8,2195.7 3351.2,2193.2 3357.7,2191.2 3364.4,2189.5 3371.1,2188.1 3377.8,2187.2 3384.7,2186.6 3391.5,2186.4 3651.3,2186.4 3684.8,2156.8 3974.2,2156.8 3981.9,2157 3989.5,2157.6 3997.2,2158.5 4004.7,2159.9 4012.2,2161.6 4019.6,2163.8 4026.9,2166.2 4034,2169.1 4041,2172.3 4047.8,2175.8 4054.4,2179.7 4060.8,2184 4067,2188.5 4072.9,2193.4 4078.6,2198.5 4084.1,2204 4089.2,2209.7 4094.1,2215.6 4098.6,2221.8 4102.9,2228.2 4106.8,2234.8 4110.3,2241.6 4113.5,2248.6 4116.4,2255.7 4118.8,2263 4121,2270.4 4122.7,2277.9 4124.1,2285.4 4125,2293.1 4125.6,2300.7 4125.8,2308.4 ; 3269.5,3521 3269.7,3527.8 3270.3,3534.7 3271.2,3541.4 3272.6,3548.1 3274.3,3554.8 3276.3,3561.3 3278.8,3567.7 3281.6,3573.9 3284.7,3580 3288.2,3585.9 3292,3591.6 3296.1,3597.1 3300.5,3602.3 3305.2,3607.3 3310.2,3612 3315.4,3616.4 3320.9,3620.5 3326.6,3624.3 3332.5,3627.8 3338.6,3630.9 3344.8,3633.7 3351.2,3636.2 3357.7,3638.2 3364.4,3639.9 3371.1,3641.3 3377.8,3642.2 3384.7,3642.8 3391.5,3643 ; 3298.9,2304.4 3299.2,2298.5 3300,2292.6 3301,2286.8 3302.5,2281.1 3304.4,2275.4 3306.6,2269.9 3309.1,2264.6 3312,2259.4 3315.3,2254.4 3318.8,2249.7 3322.7,2245.2 3326.8,2241 3331.3,2237 3335.9,2233.3 3340.8,2230 3345.9,2227 3351.2,2224.3 3356.7,2222 3362.2,2220 3368,2218.4 3373.8,2217.2 3379.6,2216.3 3385.5,2215.9 3391.5,2215.8 ; 3299,2304.5 3299,3517.1 ; 3299,3517 3299.1,3523 3299.5,3528.9 3300.3,3534.8 3301.5,3540.6 3303,3546.3 3304.9,3552 3307.2,3557.4 3309.8,3562.8 3312.7,3568 3315.9,3572.9 3319.4,3577.7 3323.3,3582.2 3327.4,3586.5 3331.8,3590.5 3336.4,3594.3 3341.2,3597.7 3346.3,3600.8 3351.5,3603.6 3356.9,3606.1 3362.4,3608.2 3368.1,3610 3373.9,3611.4 3379.7,3612.5 3385.6,3613.2 3391.5,3613.5 3974.2,3613.5 3980.1,3613.2 3986,3612.5 3991.8,3611.4 3997.6,3610 4003.3,3608.2 4008.8,3606.1 4014.2,3603.6 4019.4,3600.8 4024.5,3597.7 4029.3,3594.3 4033.9,3590.5 4038.3,3586.5 4042.4,3582.2 4046.3,3577.7 4049.8,3572.9 4053,3568 4055.9,3562.8 4058.5,3557.4 4060.8,3552 4062.7,3546.3 4064.2,3540.6 4065.4,3534.8 4066.2,3528.9 4066.6,3523 4066.7,3517 ; 3391.5,2215.9 3663.1,2215.9 3696.6,2186.4 3974.2,2186.4 3981,2186.6 3987.9,2187.2 3994.6,2188.1 4001.3,2189.5 4008,2191.2 4014.5,2193.2 4020.9,2195.7 4027.1,2198.5 4033.2,2201.6 4039.1,2205.1 4044.8,2208.9 4050.3,2213 4055.5,2217.4 4060.5,2222.1 4065.2,2227.1 4069.6,2232.3 4073.7,2237.8 4077.5,2243.5 4081,2249.4 4084.1,2255.5 4086.9,2261.7 4089.4,2268.1 4091.4,2274.6 4093.1,2281.3 4094.5,2288 4095.4,2294.7 4096,2301.6 4096.2,2308.4 4096.2,3521 4096,3527.8 4095.4,3534.7 4094.5,3541.4 4093.1,3548.1 4091.4,3554.8 4089.4,3561.3 4086.9,3567.7 4084.1,3573.9 4081,3580 4077.5,3585.9 4073.7,3591.6 4069.6,3597.1 4065.2,3602.3 4060.5,3607.3 4055.5,3612 4050.3,3616.4 4044.8,3620.5 4039.1,3624.3 4033.2,3627.8 4027.1,3630.9 4020.9,3633.7 4014.5,3636.2 4008,3638.2 4001.3,3639.9 3994.6,3641.3 3987.9,3642.2 3981,3642.8 3974.2,3643 ; 3391.5,3643.1 3974.2,3643.1 ; 3393.4,2156.8 3421,2156.8 ; v1(3630.19,2127.3) 3391.5,2127.3 3382.9,2127.5 3374.3,2128.1 3365.7,2129.1 3357.2,2130.6 3348.8,2132.4 3340.5,2134.6 3332.3,2137.3 3324.2,2140.3 3316.3,2143.7 3308.5,2147.4 3301,2151.6 3293.6,2156 3286.5,2160.9 3279.6,2166 3272.9,2171.5 3266.5,2177.3 3260.4,2183.4 3254.6,2189.8 3249.1,2196.5 3244,2203.4 3239.1,2210.5 3234.7,2217.8 3230.5,2225.4 3226.8,2233.2 3223.4,2241.1 3220.4,2249.2 3217.7,2257.4 3215.5,2265.7 3213.7,2274.1 3212.2,2282.6 3211.2,2291.2 3210.6,2299.8 3210.4,2308.4 3210.4,3521 3210.6,3529.6 3211.2,3538.2 3212.2,3546.8 3213.7,3555.3 3215.5,3563.7 3217.7,3572 3220.4,3580.2 3223.4,3588.3 3226.8,3596.2 3230.5,3604 3234.7,3611.6 3239.1,3618.9 3244,3626 3249.1,3632.9 3254.6,3639.6 3260.4,3646 3266.5,3652.1 3272.9,3657.9 3279.6,3663.4 3286.5,3668.5 3293.6,3673.4 3301,3677.8 3308.5,3682 3316.3,3685.7 3324.2,3689.1 3332.3,3692.1 3340.5,3694.8 3348.8,3697 3357.2,3698.8 3365.7,3700.3 3374.3,3701.3 3382.9,3701.9 3391.5,3702.1 3974.2,3702.1 3982.8,3701.9 3991.4,3701.3 4000,3700.3 4008.5,3698.8 4016.9,3697 4025.2,3694.8 4033.4,3692.1 4041.5,3689.1 4049.4,3685.7 4057.2,3682 4064.8,3677.8 4072.1,3673.4 4079.2,3668.5 4086.1,3663.4 4092.8,3657.9 4099.2,3652.1 4105.3,3646 4111.1,3639.6 4116.6,3632.9 4121.7,3626 4126.6,3618.9 4131,3611.6 4135.2,3604 4138.9,3596.2 4142.3,3588.3 4145.3,3580.2 4148,3572 4150.2,3563.7 4152,3555.3 4153.5,3546.8 4154.5,3538.2 4155.1,3529.6 4155.3,3521 4155.3,2308.4 4155.1,2299.8 4154.5,2291.2 4153.5,2282.6 4152,2274.1 4150.2,2265.7 4148,2257.4 4145.3,2249.2 4142.3,2241.1 4138.9,2233.2 4135.2,2225.4 4131,2217.9 4126.6,2210.5 4121.7,2203.4 4116.6,2196.5 4111.1,2189.8 4105.3,2183.4 4099.2,2177.3 4092.8,2171.5 4086.1,2166 4079.2,2160.9 4072.1,2156 4064.7,2151.6 4057.2,2147.4 4049.4,2143.7 4041.5,2140.3 4033.4,2137.3 4025.2,2134.6 4016.9,2132.4 4008.5,2130.6 4000,2129.1 3991.4,2128.1 3982.8,2127.5 3974.2,2127.3 3673,2127.3 3643.4,2156.8 3421,2156.8 ; v1(3728,2277) 3730,2275 3972.79,2275 3975.61,2274.98 3977.7,2275.1 3981.2,2275.6 3984.6,2276.5 3987.8,2277.8 3990.9,2279.4 3993.9,2281.3 3996.6,2283.5 3999.1,2286 4001.3,2288.7 4003.2,2291.7 4004.8,2294.8 4006.1,2298 4007,2301.4 4007.5,2304.9 4007.7,2308.4 ; 3974.1,2215.8 3980.1,2215.9 3986,2216.3 3991.8,2217.2 3997.6,2218.4 4003.4,2220 4008.9,2222 4014.4,2224.3 4019.7,2227 4024.8,2230 4029.7,2233.3 4034.3,2237 4038.8,2241 4042.9,2245.2 4046.8,2249.7 4050.3,2254.4 4053.6,2259.4 4056.5,2264.6 4059,2269.9 4061.2,2275.4 4063.1,2281.1 4064.6,2286.8 4065.6,2292.6 4066.4,2298.5 4066.7,2304.4 ; 3974.2,2215.9 3704.5,2215.9 3671,2245.4 3391.5,2245.4 3386.6,2245.6 3381.6,2246.2 3376.8,2247.1 3372,2248.5 3367.4,2250.2 3362.9,2252.3 3358.6,2254.7 3354.5,2257.4 3350.6,2260.5 3347,2263.9 3343.6,2267.5 3340.5,2271.4 3337.8,2275.5 3335.4,2279.8 3333.3,2284.3 3331.6,2288.9 3330.2,2293.7 3329.3,2298.5 3328.7,2303.5 3328.5,2308.4 3328.5,3521 3328.7,3525.9 3329.3,3530.9 3330.2,3535.7 3331.6,3540.5 3333.3,3545.1 3335.4,3549.6 3337.8,3553.9 3340.5,3558 3343.6,3561.9 3347,3565.5 3350.6,3568.9 3354.5,3572 3358.6,3574.7 3362.9,3577.1 3367.4,3579.2 3372,3580.9 3376.8,3582.3 3381.6,3583.2 3386.6,3583.8 3391.5,3584 3974.2,3584 3979.1,3583.8 3984.1,3583.2 3988.9,3582.3 3993.7,3580.9 3998.3,3579.2 4002.8,3577.1 4007.1,3574.7 4011.2,3572 4015.1,3568.9 4018.7,3565.5 4022.1,3561.9 4025.2,3558 4027.9,3553.9 4030.3,3549.6 4032.4,3545.1 4034.1,3540.5 4035.5,3535.7 4036.4,3530.9 4037,3525.9 4037.2,3521 ; 4007.6,2308.4 4007.6,3521 ; 4007.7,3521 4007.5,3524.5 4007,3528 4006.1,3531.4 4004.8,3534.6 4003.2,3537.7 4001.3,3540.7 3999.1,3543.4 3996.6,3545.9 3993.9,3548.1 3990.9,3550 3987.8,3551.6 3984.6,3552.9 3981.2,3553.8 3977.7,3554.3 3974.2,3554.5 3391.5,3554.5 3388,3554.3 3384.5,3553.8 3381.1,3552.9 3377.9,3551.6 3374.7,3550 3371.8,3548.1 3369.1,3545.9 3366.6,3543.4 3364.4,3540.7 3362.5,3537.7 3360.9,3534.6 3359.6,3531.4 3358.7,3528 3358.2,3524.5 3358,3521 3358,2308.4 3358.3,2305.1 3359.1,2301.9 3360.1,2298.8 3361.5,2295.8 3363.2,2292.9 3365.1,2290.3 3367.4,2287.8 3369.9,2285.6 3372.6,2283.7 3375.4,2282.1 3378.5,2280.8 3381.6,2279.8 3384.9,2279.1 3388.2,2278.8 3391.5,2278.9 3678.9,2278.9 3712.3,2245.4 3974.2,2245.4 3979.1,2245.6 3984.1,2246.2 3988.9,2247.1 3993.7,2248.5 3998.3,2250.2 4002.8,2252.3 4007.1,2254.7 4011.2,2257.4 4015.1,2260.5 4018.7,2263.9 4022.1,2267.5 4025.2,2271.4 4027.9,2275.5 4030.3,2279.8 4032.4,2284.3 4034.1,2288.9 4035.5,2293.7 4036.4,2298.5 4037,2303.5 4037.2,2308.4 ; 4037.1,2308.4 4037.1,3521 ; 4066.7,2304.5 4066.7,3517.1 ; 4125.7,2308.4 4125.7,2361.6 ; 4125.7,2324.2 4125.7,2361.6 ; 4125.7,3521 4125.7,2361.6 ; 4125.8,3521 4125.6,3528.7 4125,3536.3 4124.1,3544 4122.7,3551.5 4121,3559 4118.8,3566.4 4116.4,3573.7 4113.5,3580.8 4110.3,3587.8 4106.8,3594.6 4102.9,3601.2 4098.6,3607.6 4094.1,3613.8 4089.2,3619.7 4084.1,3625.4 4078.6,3630.9 4072.9,3636 4067,3640.9 4060.8,3645.4 4054.4,3649.7 4047.8,3653.6 4041,3657.1 4034,3660.3 4026.9,3663.2 4019.6,3665.6 4012.2,3667.8 4004.7,3669.5 3997.2,3670.9 3989.5,3671.8 3981.9,3672.4 3974.2,3672.6 3391.5,3672.6 3383.8,3672.4 3376.2,3671.8 3368.5,3670.9 3361,3669.5 3353.5,3667.8 3346.1,3665.6 3338.8,3663.2 3331.7,3660.3 3324.7,3657.1 3317.9,3653.6 3311.3,3649.7 3304.9,3645.4 3298.7,3640.9 3292.8,3636 3287.1,3630.9 3281.6,3625.4 3276.5,3619.7 3271.6,3613.8 3267.1,3607.6 3262.8,3601.2 3258.9,3594.6 3255.4,3587.8 3252.2,3580.8 3249.3,3573.7 3246.9,3566.4 3244.7,3559 3243,3551.5 3241.6,3544 3240.7,3536.3 3240.1,3528.7 3239.9,3521 3239.9,2308.4 3240.1,2300.7 3240.7,2293.1 3241.6,2285.4 3243,2277.9 3244.7,2270.4 3246.9,2263 3249.3,2255.7 3252.2,2248.6 3255.4,2241.6 3258.9,2234.8 3262.8,2228.2 3267.1,2221.8 3271.6,2215.6 3276.5,2209.7 3281.6,2204 3287.1,2198.5 3292.8,2193.4 3298.7,2188.5 3304.9,2184 3311.3,2179.7 3317.9,2175.8 3324.7,2172.3 3331.7,2169.1 3338.8,2166.2 3346.1,2163.8 3353.5,2161.6 3361,2159.9 3368.5,2158.5 3376.2,2157.6 3383.8,2157 3391.5,2156.8 3421,2156.8
RX: C4.2 R4.2 U1.10 | length 353.6
  Top Layer w10: U1.10 3775,3166.5 3775,3141 3787,3129 v1(3827,3129) ; v1(3872,3012) 3917.54,3012 R4.2 3918,3009.54 C4.2
  Bottom Layer w10: v1(3827,3129) 3872,3084 v1(3872,3012)
TVDD: FB2.2 U1.5 | length 202.3
  Top Layer w8: FB2.2 3670.63,3067 3679.69,3076.05 3679.69,3129.31 3676,3133 3676,3166.76 U1.5
TX1: L2.2 U1.4 | length 78.6
  Top Layer w10: L2.2 3656.47,3096.08 U1.4
TX2: L1.2 U1.6 | length 91.5
  Top Layer w10: U1.6 3695.84,3105.91 3711.14,3090.61 L1.2
USB_N: J1.A7 J1.B7 U4.23 | length 3598.7
  Top Layer w10: J1.B7 3656.38,1639.79 3656.38,1662.79 3665.11,1671.52 v1@3679.22,1671.52 ; v1(3678.32,1678.33) 3679.22,1677.44 v1@3679.22,1671.52 ; U4.23 3682.54,3915.69 3685.41,3918.57 3685.91,3918.57 3691.77,3924.42 3691.77,3958.5 3684.96,3965.31 v1(3684.96,3969) ; J1.A7 3693.94,1639.79 3693.94,1662.78 3691.06,1665.65 3685.21,1671.52 v1@3679.22,1671.52
  Bottom Layer w10: v1(3678.32,1678.33) 3680.93,1680.94 3680.93,1692.49 3683.31,1694.88 3683.31,1713.58 3699.17,1729.44 3699.53,1729.44 3717.09,1747 4214.79,1747 4313,1845.21 4313,3869 4263,3919 3708.9,3919 3691.77,3936.13 3691.77,3958.5 3684.96,3965.31 v1(3684.96,3969)
USB_P: J1.A6 J1.B6 U4.24 | length 3635.6
  Top Layer w10: J1.A6 3676.06,1637.98 3676.06,1614.98 3684.79,1606.24 3704.89,1606.24 3710.75,1612.1 3710.75,1618.37 3714.53,1622.15 3713.62,1623.06 3713.62,1670.25 3706.85,1677.03 v1(3706.85,1680.71) ; v1(3713.58,3969) 3713.58,3965.31 3706.77,3958.5 3706.77,3924.42 3712.63,3918.57 3713.13,3918.57 3716,3915.69 U4.24
  Bottom Layer w10: v1(3706.85,1680.71) 3706.85,1684.4 3698.31,1692.93 3698.31,1707.37 3705.39,1714.44 3705.74,1714.44 3723.3,1732 4221,1732 4328,1839 4328,3875.21 4269.21,3934 3715.11,3934 3706.77,3942.35 3706.77,3958.5 3713.58,3965.31 v1(3713.58,3969)
VCC: C11.1 C12.1 C13.1 C14.1 C15.1 FB1.1 FB2.1 LS1.P R3.2 R10.2 R11.2 R12.2 U1.17 U1.23 U1.39 U1.40 U2.2 U2.4 U4.3 U5.8 U6.4 U7.4 U8.4 U9.4 U10.4 | length 8319
  Top Layer w10: U2.4 U2.2 3363.62,1778 3386.94,1754.68 C14.1 3469.84,1754.68 3534.15,1819 3670.78,1819 3831.85,1980.06 LS1.P ; v1(3228,4138) 3230.61,4140.61 3235.98,4140.61 3264.36,4168.98 3264.36,4153.95 3259.76,4149.35 3259.76,4093.41 U5.8 ; R11.2 R12.2@3264.36,4220.98 ; R12.2 3264.36,4313.5 ; v1(3348,4392) 3314.25,4392 3265.32,4343.06 C12.1 C12.1@3264.36,4341.05 ; U4.3 3399.07,4350.73 3356.34,4308 3269.86,4308 3264.36,4313.5 ; R3.2 3514.97,3162.41 3539.73,3187.17 ; FB2.1 3523.29,3067 3541.84,3085.55 3541.84,3090 3577.84,3126 ; v1(3541,3863) 3539,3861 3539,3760 3808,3491 C13.1 ; U1.40 3565.62,3198.72 3539.73,3198.72 ; U1.39 3565.21,3217.39 3546.86,3217.39 3539.73,3210.27 3539.73,3198.72 ; v1(3627,3126) 3577.84,3126 ; U1.23 3735.21,3452.21 3773.66,3490.66 3892.66,3490.66 3892.66,3435.34 C15.1 3891.32,3434 3875,3434 3849,3408 ; U1.17 3806.79,3317.24 3824.67,3317.24 3849,3341.57 3849,3408 ; v1(3831,3011) 3831,3014.69 3846.62,3030.3 FB1.1 ; v1(3848,3453) 3849,3452 3849,3408 ; v1(4010,4277) 4010,4280.69 4023.41,4294.1 R10.2 ; 3264.36,4313.5 3264,4313.86 3264,4340.68 C12.1@3264.36,4341.05 ; 3264.36,4313.5 C12.1@3264.36,4341.05 ; 3539.73,3187.17 3539.73,3164.11 3577.84,3126 ; 3539.73,3187.17 3539.73,3198.72
  Top Layer w15: U2.4 3072.94,2030.79 3053,2050.72 3053,2249 3038,2264 3038,3994.62 3264.36,4220.98 R12.2
  Bottom Layer w10: v1(3228,4138) 3228,4017.49 3247.49,3998 3361.24,3998 ; U6.4 3361.24,3998 ; v1(3348,4392) 3463,4277 v1(4010,4277) ; U7.4 3498.54,3998 ; v1(3541,3863) 3541,3944.46 3594.54,3998 ; v1(3627,3126) 3716,3126 ; U8.4 3690.54,3998 ; v1(3831,3011) 3716,3126 ; v1(3848,3453) 3849,3452 3849,3205 3770,3126 3716,3126 ; U9.4 3883.54,3998 ; U10.4 4075.54,3998 3883.54,3998 ; 3361.24,3998 3498.54,3998 ; 3498.54,3998 3594.54,3998 ; 3594.54,3998 3690.54,3998 ; 3690.54,3998 3883.54,3998
VMID: C3.2 R4.1 U1.9 | length 270.2
  Top Layer w8: U1.9 3756,3165.82 3756,3132.69 3790.48,3098.21 R4.1@3903.08,3098.21 ; C3.2 3893.32,3107.97 R4.1@3903.08,3098.21 ; R4.1 3919,3082.28 R4.1@3903.08,3098.21
X1: C1.2 U1.14 Y1.3 | length 206.7
  Top Layer w5: U1.14 3852.21,3257.47 3881.41,3286.67 3916.39,3286.67 3936.68,3266.38 Y1.3 3936.68,3215.03 C1.2
X2: C2.2 U1.15 Y1.1 | length 172.8
  Top Layer w5: U1.15 3833.34,3277.16 3871.77,3315.59 Y1.1 3897.32,3376.97 C2.2
pads on no net: J1. J1.A8 J1.B8 J2. LS1.1 LS1.2 U1.2 U1.12 U1.13 U1.19 U1.20 U1.21 U1.22 U1.24 U1.26 U1.31 U1.32 U1.33 U1.34 U1.35 U1.36 U1.37 U3.1 U4.4 U4.5 U4.6 U4.7 U4.8 U4.9 U4.21 U4.22 U4.25 U4.26 U4.27 U4.28 U4.29 U4.30 U4.31 U4.32 U4.33 U4.34 U4.39 U4.40 U4.41 U4.44 U5.1 U5.2 U5.3 U5.7 U6.1

## Polygon pours and split planes (outlines as drawn)
GND on Bottom Layer "GND_L02_P004" (solid, pour order 4): 2800,1458.11 2800,4371.5 cw(c2918.11,4371.5) 2918.11,4489.61 4453.54,4489.61 cw(c4453.54,4371.5) 4571.65,4371.5 4571.65,1458.11 cw(c4453.54,1458.11) 4453.54,1340 2918.11,1340 cw(c2918.11,1458.11)
GND on Top Layer "GND_L01_P003" (solid, pour order 3): 2800,1458.11 2800,4371.5 cw(c2918.11,4371.5) 2918.11,4489.61 4453.54,4489.61 cw(c4453.54,4371.5) 4571.65,4371.5 4571.65,1458.11 cw(c4453.54,1458.11) 4453.54,1340 2918.11,1340 cw(c2918.11,1458.11)

## Other copper
Bottom Layer:
  text "AirReader" at 3803,2055.66 h60

## Silkscreen, mask and mechanical layers (free items; w line width, h text height)
Top Overlay:
  lines w10: 3537,3437 3564.92,3409.08
  text "eSE" at 3147,4061.88 h60
  text "RST" at 4050,3932.88 h60
  text "DBG" at 4206.72,3883.88 h60
  text "PN532" at 3298,3441.48 h100
  text "BAT" at 4067,1899 h60
  text "+" at 4068,1612.53 h100
Bottom Overlay:
  text "Secure DESFire Reader" at 3907.98,3808.73 h50
  text "vigue.me" at 3776.98,1992.54 h50
Bottom Solder:
  text "AirReader" at 3803,2055.66 h60

## Text inside footprints (layer, text, board x,y; h text height)
LS1: Top Overlay "-" at 3707,2044.63 h32 r270; Top Overlay "+" at 3932,2052.5 h32 r270; Top 3D Body "+" at 3932,2052.5 h32 r270; Top 3D Body "-" at 3707,2044.63 h32 r270